# Altium PCB Femto_frame.PcbDoc
Units mm, origin at the board's own origin, x right, y up, seen from the top; angles counter-clockwise.
Board outline 12 x 12 mm, 2 copper layers (L1 [TOP], L2 [BOT]), stack 1.57 mm thick; 2 components, 0 nets, 124 pads, 44 vias.
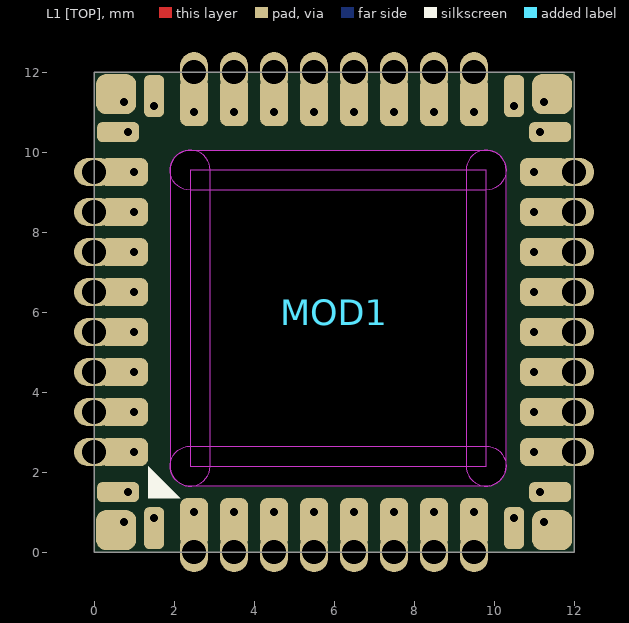
[diagram p0: L1 [TOP] view]
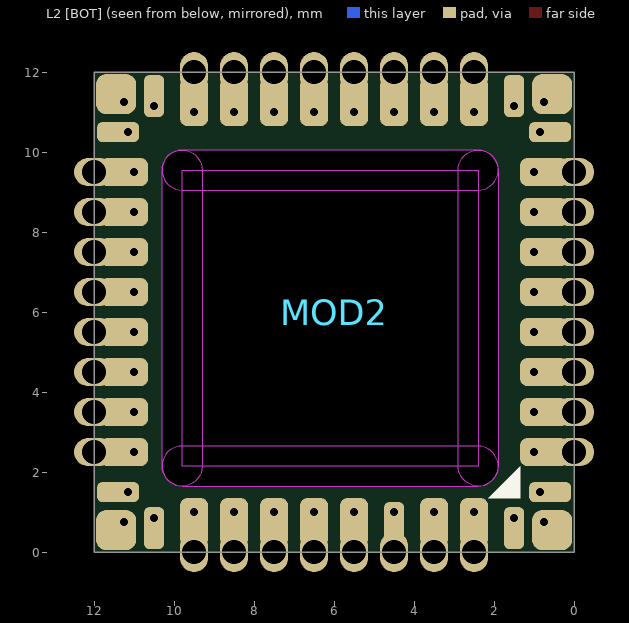
[diagram p1: L2 [BOT] view, seen from below]

## Layer stack, top to bottom
Soldermask [TOP]: solder mask 0.01, Solder Resist, Dk 3.5
L1 [TOP]: signal copper 0.035
Core: dielectric 1.5, FR-4, Dk 4.8
L2 [BOT]: signal copper 0.035
Soldermask [BOT]: solder mask 0.01, Solder Resist, Dk 3.5

## Board outline
0,0 0,12 12,12 12,0
cut-out: 2.4,1.65 cw(c2.4,2.15) 2.4,2.65 9.8,2.65 cw(c9.8,2.15) 10.3,2.15 cw(c9.8,2.15) 9.8,1.65
cut-out: 1.9,2.15 ccw(c2.4,2.15) 2.9,2.15 2.9,9.55 ccw(c2.4,9.55) 1.9,9.55
cut-out: 2.4,9.05 cw(c2.4,9.55) 2.4,10.05 9.8,10.05 cw(c9.8,9.55) 10.3,9.55 cw(c9.8,9.55) 9.8,9.05
cut-out: 9.3,2.15 ccw(c9.8,2.15) 10.3,2.15 10.3,9.55 ccw(c9.8,9.55) 9.3,9.55
cut-out: 2.4,2.15 9.8,2.15 9.8,9.55 2.4,9.55

## Design rules (kind name [scope] priority, off if disabled: settings)
BoardOutlineClearance [All] p1: gap=0.25 ignorepadtopadclearanceinfootprint=FALSE
Clearance [All] p1: gap=0.2 ignorepadtopadclearanceinfootprint=FALSE
HoleSize [All] p1: absolutevalues=TRUE maxlimit=5 minlimit=0.2 maxpercent=80.000 minpercent=20.000
HoleToHoleClearance [All] p1: gap=0.4 allowstackedmicrovias=TRUE
MinimumAnnularRing [All] p1: minimumring=0.15
MinimumSolderMaskSliver [All] p1: minsoldermaskwidth=0.15
PolygonConnect [All] p1: connectstyle=Relief reliefconductorwidth=0.254 reliefentries=4 polygonreliefangle="90 Angle" airgapwidth=0.254
RoutingVias [All] p1: holewidth=0.711 width=1.27 viastyle="Through Hole" minholewidth=0.711 minwidth=1.27 maxholewidth=0.711 maxwidth=1.27
SilkToSilkClearance [All] p1: silktosilkclearance=0.15
SilkToSolderMaskClearance [IsPad] p1: minsilkscreentomaskgap=0.15 clearancetoexposedcopper=TRUE
SolderMaskExpansion [All] p1: expansion=0.05 istentingtop=FALSE
Width [All] p1: maxlimit=0.254 minlimit=0.254 preferedwidth=0.254
25 further rules are at their usual default settings.

## Components (designator, comment, footprint, x,y, rotation, side; value= is the part's Value field where it differs from the comment)
MOD1 "Comment" PCB_LGA40_120X120_P100#1 5.975,5.975 r0 top locked
MOD2 "Comment" PCB_LGA40_120X120_P100#2 5.975,5.975 r0 bottom locked

## Footprints (in the part's own frame and the unit in brackets; to place one, negate y for a bottom-side part, rotate by r counter-clockwise, add the part's x,y. Pads: shape width x height; smd on the part's side, far side on the other; paste and mask are expansions set on the pad)
PCB_LGA40_120X120_P100#1 [mm]
  rrect50% 1x1 smd: 1(-5.425,-5.425) 12(5.475,-5.425) 23(5.475,5.475) 34(-5.425,5.475)
  rrect50% 0.5x1.05 smd: 2(-4.475,-5.375) 11(4.525,-5.375) 24(4.525,5.425) 33(-4.475,5.425)
  rrect50% 0.7x1.2 smd: 3(-3.475,-5.225) 4(-2.475,-5.225) 5(-1.475,-5.225) 6(-0.475,-5.225) 7(0.525,-5.225) 8(1.525,-5.225) 9(2.525,-5.225) 10(3.525,-5.225) 25(3.525,5.275) 26(2.525,5.275) 27(1.525,5.275) 28(0.525,5.275) 29(-0.475,5.275) 30(-1.475,5.275) 31(-2.475,5.275) 32(-3.475,5.275)
  rrect50% 1.05x0.5 smd: 13(5.425,-4.475) 22(5.425,4.525) 35(-5.375,4.525) 44(-5.375,-4.475)
  rrect50% 1.2x0.7 smd: 14(5.275,-3.475) 15(5.275,-2.475) 16(5.275,-1.475) 17(5.275,-0.475) 18(5.275,0.525) 19(5.275,1.525) 20(5.275,2.525) 21(5.275,3.525) 36(-5.225,3.525) 37(-5.225,2.525) 38(-5.225,1.525) 39(-5.225,0.525) 40(-5.225,-0.475) 41(-5.225,-1.475) 42(-5.225,-2.475) 43(-5.225,-3.475)
PCB_LGA40_120X120_P100#2 [mm]
  rrect50% 1x1 smd: 1(-5.425,5.425) 12(5.475,5.425) 23(5.475,-5.475) 34(-5.425,-5.475)
  rrect50% 0.5x1.05 smd: 2(-4.475,5.375) 11(4.525,5.375) 24(4.525,-5.425) 33(-4.475,-5.425)
  rrect50% 0.7x1.2 smd: 3(-3.475,5.225) 4(-2.475,5.225) 6(-0.475,5.225) 7(0.525,5.225) 8(1.525,5.225) 9(2.525,5.225) 10(3.525,5.225) 25(3.525,-5.275) 26(2.525,-5.275) 27(1.525,-5.275) 28(0.525,-5.275) 29(-0.475,-5.275) 30(-1.475,-5.275) 31(-2.475,-5.275) 32(-3.475,-5.275)
  rrect50% 0.5x1 smd: 5(-1.475,5.225)
  rrect50% 1.05x0.5 smd: 13(5.425,4.475) 22(5.425,-4.525) 35(-5.375,-4.525) 44(-5.375,4.475)
  rrect50% 1.2x0.7 smd: 14(5.275,3.475) 15(5.275,2.475) 16(5.275,1.475) 17(5.275,0.475) 18(5.275,-0.525) 19(5.275,-1.525) 20(5.275,-2.525) 21(5.275,-3.525) 36(-5.225,-3.525) 37(-5.225,-2.525) 38(-5.225,-1.525) 39(-5.225,-0.525) 40(-5.225,0.475) 41(-5.225,1.475) 42(-5.225,2.475) 43(-5.225,3.475)

## Part data
MOD1 MOD2: library part 430152050836

## Free pads (board coordinates)
  oval 1x0.7 hole 0.6 mask+0.1: H(0,2.5) H(0,3.5) H(0,4.5) H(0,5.5) H(0,6.5) H(0,7.5) H(0,8.5) H(0,9.5) H(12,2.5) H(12,3.5) H(12,4.5) H(12,5.5) H(12,6.5) H(12,7.5) H(12,8.5) H(12,9.5)
  round 0 hole 1 slot 8.4 at 90 deg unplated mask+0.05: H(2.4,5.85) H(9.8,5.85)
  oval 0.7x1 hole 0.6 mask+0.1: H(2.5,0) H(2.5,12) H(3.5,0) H(3.5,12) H(4.5,12) H(4.5,0) H(5.5,12) H(5.5,0) H(6.5,12) H(6.5,0) H(7.5,0) H(7.5,12) H(8.5,0) H(8.5,12) H(9.5,0) H(9.5,12)
  round 0 hole 1 slot 8.4 at 0 deg unplated mask+0.05: H(6.1,9.55) H(6.1,2.15)

## Via types
v1: diameter 0.5, hole 0.2, L1 [TOP] to L2 [BOT], 44 vias

## Nets (pads, with @x,y where several pads share a name; then routed paths per layer and width w, separated by ;. In a path a pad name is that pad's centre, name@x,y a point inside that pad or via, vN(x,y) a via of type N, cw(c..) or ccw(c..) an arc to the next point about the centre after c; other vN are vias at no path point)
pads on no net: MOD1.1 MOD1.2 MOD1.3 MOD1.4 MOD1.5 MOD1.6 MOD1.7 MOD1.8 MOD1.9 MOD1.10 MOD1.11 MOD1.12 MOD1.13 MOD1.14 MOD1.15 MOD1.16 MOD1.17 MOD1.18 MOD1.19 MOD1.20 MOD1.21 MOD1.22 MOD1.23 MOD1.24 MOD1.25 MOD1.26 MOD1.27 MOD1.28 MOD1.29 MOD1.30 MOD1.31 MOD1.32 MOD1.33 MOD1.34 MOD1.35 MOD1.36 MOD1.37 MOD1.38 MOD1.39 MOD1.40 MOD1.41 MOD1.42 MOD1.43 MOD1.44 MOD2.1 MOD2.2 MOD2.3 MOD2.4 MOD2.5 MOD2.6 MOD2.7 MOD2.8 MOD2.9 MOD2.10 MOD2.11 MOD2.12 MOD2.13 MOD2.14 MOD2.15 MOD2.16 MOD2.17 MOD2.18 MOD2.19 MOD2.20 MOD2.21 MOD2.22 MOD2.23 MOD2.24 MOD2.25 MOD2.26 MOD2.27 MOD2.28 MOD2.29 MOD2.30 MOD2.31 MOD2.32 MOD2.33 MOD2.34 MOD2.35 MOD2.36 MOD2.37 MOD2.38 MOD2.39 MOD2.40 MOD2.41 MOD2.42 MOD2.43 MOD2.44
copper on no net:
  other v1: 0.75,0.75 11.25,0.75 1.5,0.85 10.5,0.85 2.5,1 3.5,1 4.5,1 5.5,1 6.5,1 7.5,1 8.5,1 9.5,1 0.85,1.5 11.15,1.5 1,2.5 11,2.5 1,3.5 11,3.5 1,4.5 11,4.5 1,5.5 11,5.5 1,6.5 11,6.5 1,7.5 11,7.5 1,8.5 11,8.5 1,9.5 11,9.5 0.85,10.5 11.15,10.5 2.5,11 3.5,11 4.5,11 5.5,11 6.5,11 7.5,11 8.5,11 9.5,11 1.5,11.15 10.5,11.15 0.75,11.25 11.25,11.25

## Silkscreen, mask and mechanical layers (free items; w line width, h text height)
M01 BoardOutline:
  lines w0.1: 0,0 0,12 12,12 12,0 0,0 ; 1.9,1.65 10.3,1.65 10.3,10.05 1.9,10.05 1.9,1.65
M02 PanelOutline:
  lines w0.1: 0,0 12,0 12,12 0,12 0,0
  lines w1: 2.4,2.15 9.8,2.15 9.8,9.55 2.4,9.55 2.4,2.15

## Dimensions
0,0 to 12,0 on M10 Dimensions
12,0 to 12,12 on M10 Dimensions